# Altium PCB PPM_USB_panelized.PcbDoc
Units mm, origin at the board's own origin, x right, y up, seen from the top; angles counter-clockwise.
Board outline 70.2 x 74.91 mm, 2 copper layers (Top Layer, Bottom Layer); 108 components, 0 nets, 408 pads, 36 vias.
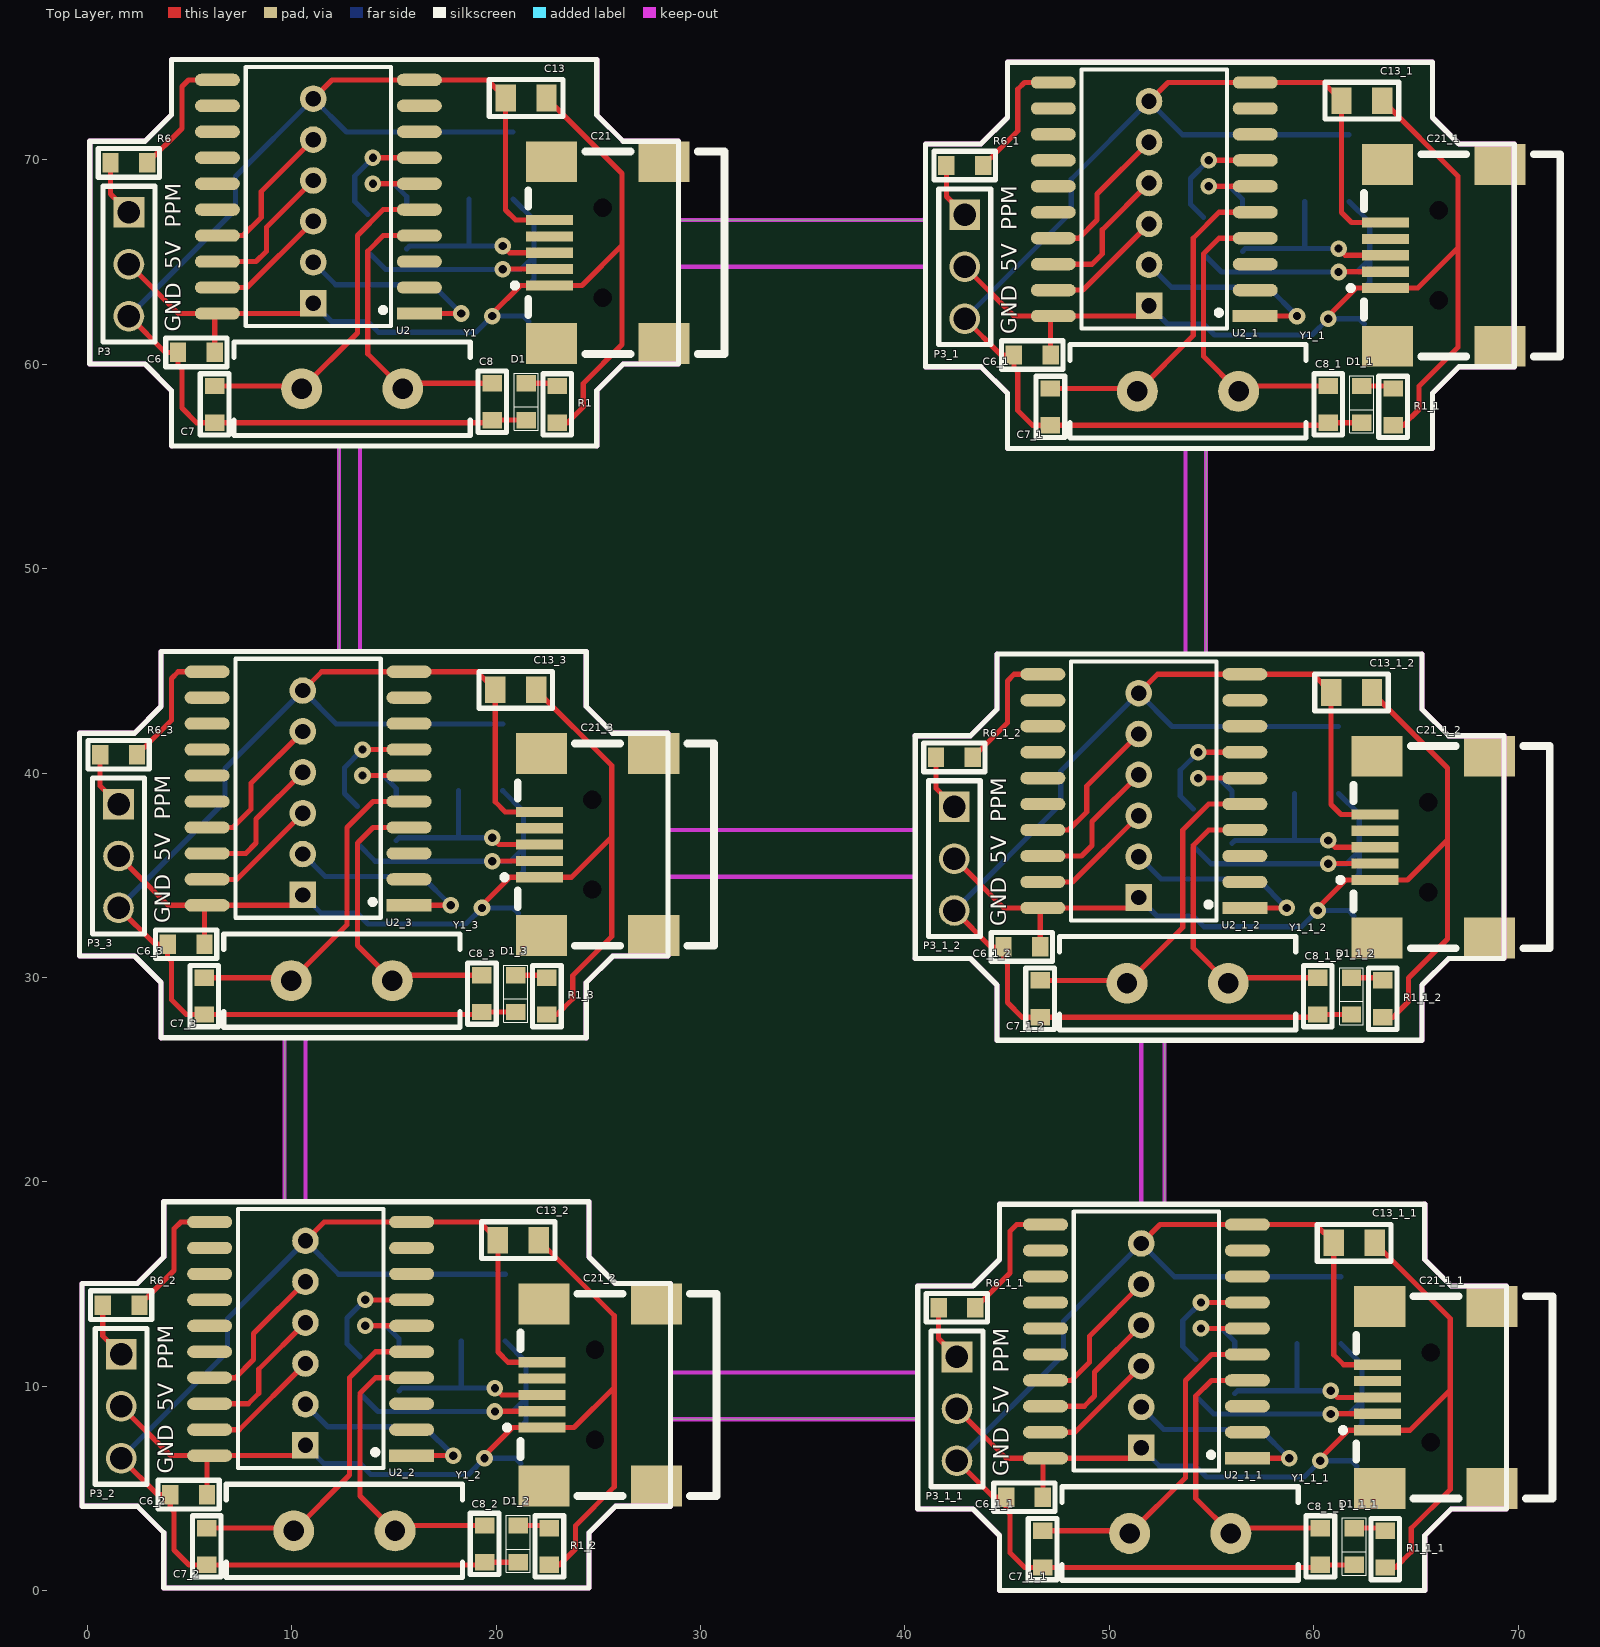
[diagram p0: Top Layer view]
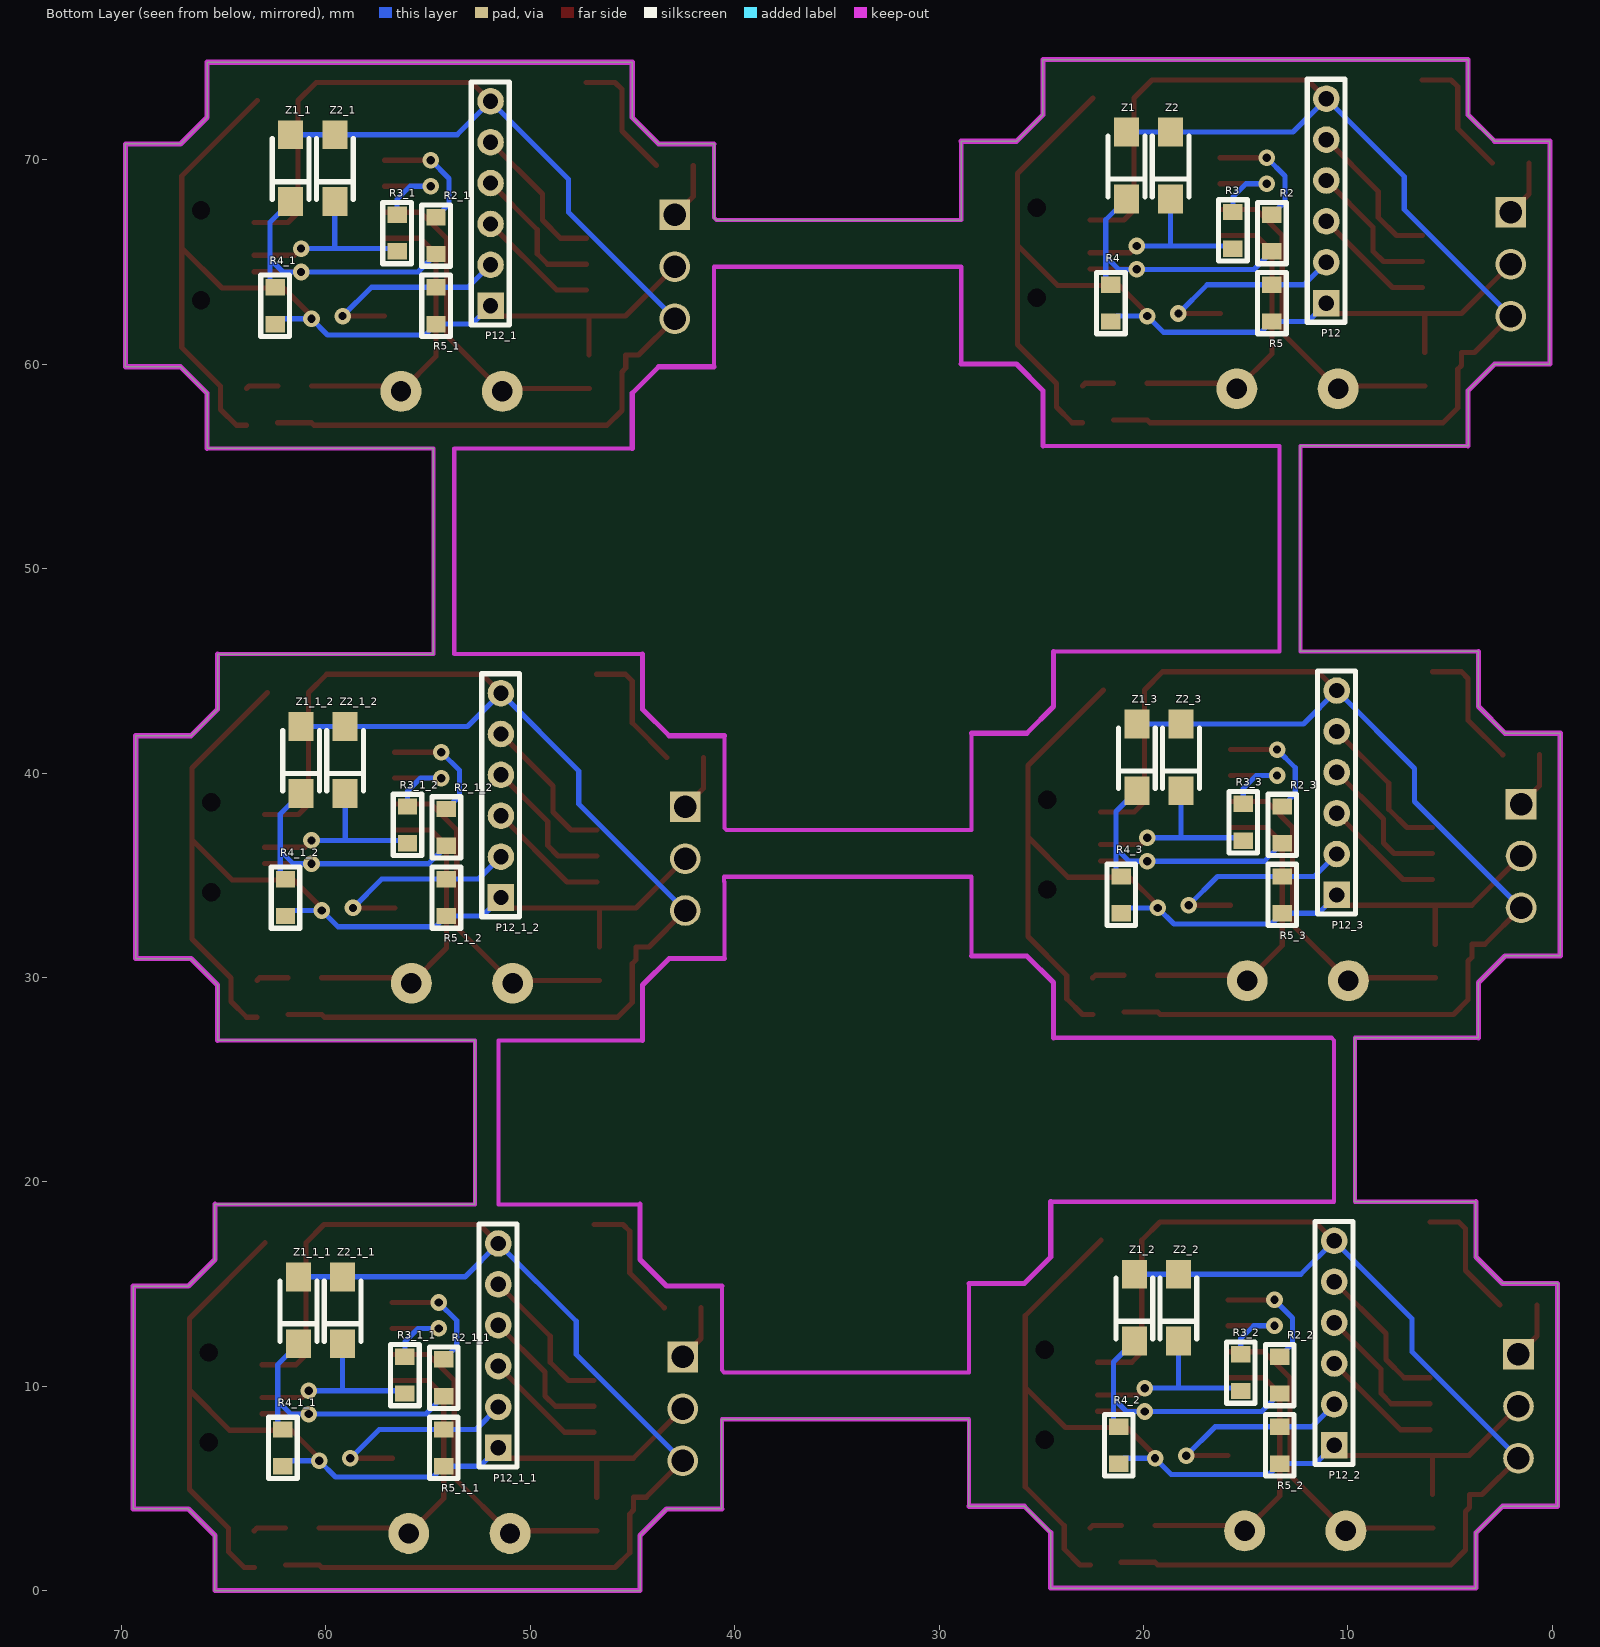
[diagram p1: Bottom Layer view, seen from below]

## Layer stack, top to bottom
Top Solder: solder mask 0.0102, Solder Resist, Dk 3.5
Top Layer: signal copper 0.0356
Dielectric 1: dielectric 0.32, FR-4, Dk 4.8
Bottom Layer: signal copper 0.0356
Bottom Solder: solder mask 0.0102, Solder Resist, Dk 3.5

## Board outline
-0.265,4.126 2.435,4.126 3.735,2.826 3.735,0.126 24.535,0.126 24.535,2.826 25.835,4.126 28.535,4.126 28.535,8.382 40.629,8.382 40.629,3.999 43.329,3.999 44.629,2.699 44.629,-0.001 65.429,-0.001 65.429,2.699 66.729,3.999 69.429,3.999 69.429,14.899 66.729,14.899 65.429,16.199 65.429,18.899 52.705,18.899 52.705,26.923 65.302,26.923 65.302,29.623 66.602,30.923 69.302,30.923 69.302,41.823 66.602,41.823 65.302,43.123 65.302,45.823 54.737,45.823 54.737,55.88 54.736,55.879 65.81,55.879 65.81,58.579 67.11,59.879 69.81,59.879 69.81,70.779 67.11,70.779 65.81,72.079 65.81,74.779 45.01,74.779 45.01,72.079 43.71,70.779 41.01,70.779 41.01,67.172 40.894,67.056 28.916,67.056 28.916,70.906 26.216,70.906 24.916,72.206 24.916,74.906 4.116,74.906 4.116,72.206 2.816,70.906 0.116,70.906 0.116,60.006 2.816,60.006 4.116,58.706 4.116,56.006 12.319,56.006 12.319,45.95 3.608,45.95 3.608,43.25 2.308,41.95 -0.392,41.95 -0.392,31.05 2.308,31.05 3.608,29.75 3.608,27.05 9.652,27.05 9.652,19.026 3.735,19.026 3.735,16.326 2.435,15.026 -0.265,15.026

## Design rules (kind name [scope] priority, off if disabled: settings)
Clearance [All] p1: gap=0.254
PolygonConnect [All] p1: connectstyle=Relief reliefconductorwidth=0.254 reliefentries=4 polygonreliefangle="90 Angle" airgapwidth=0.254
RoutingVias [All] p1: holewidth=0.711 width=1.27 viastyle="Through Hole" minholewidth=0.711 minwidth=1.27 maxholewidth=0.711 maxwidth=1.27
SolderMaskExpansion [All] p1: expansion=0.102
Width [All] p1: maxlimit=0.254 minlimit=0.254 preferedwidth=0.254
30 further rules are at their usual default settings.

## Components (designator, comment, footprint, x,y, rotation, side; value= is the part's Value field where it differs from the comment)
C6 "100nF" FP_0603_CAP_080 5.334,60.579 r0 top
C6_1 "100nF" FP_0603_CAP_080 46.228,60.452 r0 top
C6_1_1 "100nF" FP_0603_CAP_080 45.847,4.572 r0 top
C6_1_2 "100nF" FP_0603_CAP_080 45.72,31.496 r0 top
C6_2 "100nF" FP_0603_CAP_080 4.953,4.699 r0 top
C6_3 "100nF" FP_0603_CAP_080 4.826,31.623 r0 top
C7 "27pF" FP_0603_CAP_080 6.223,58.039 r90 top
C7_1 "27pF" FP_0603_CAP_080 47.117,57.912 r90 top (schematic designator C7)
C7_1_1 "27pF" FP_0603_CAP_080 46.736,2.032 r90 top (schematic designator C7)
C7_1_2 "27pF" FP_0603_CAP_080 46.609,28.956 r90 top (schematic designator C7)
C7_2 "27pF" FP_0603_CAP_080 5.842,2.159 r90 top (schematic designator C7)
C7_3 "27pF" FP_0603_CAP_080 5.715,29.083 r90 top (schematic designator C7)
C8 "27pF" FP_0603_CAP_080 19.812,58.166 r90 top
C8_1 "27pF" FP_0603_CAP_080 60.706,58.039 r90 top (schematic designator C8)
C8_1_1 "27pF" FP_0603_CAP_080 60.325,2.159 r90 top (schematic designator C8)
C8_1_2 "27pF" FP_0603_CAP_080 60.198,29.083 r90 top (schematic designator C8)
C8_2 "27pF" FP_0603_CAP_080 19.431,2.286 r90 top (schematic designator C8)
C8_3 "27pF" FP_0603_CAP_080 19.304,29.21 r90 top (schematic designator C8)
C13 "22uF" FP_0805_CAP_085 21.463,73.025 r0 top
C13_1 "22uF" FP_0805_CAP_085 62.357,72.898 r0 top (schematic designator C13)
C13_1_1 "22uF" FP_0805_CAP_085 61.976,17.018 r0 top (schematic designator C13)
C13_1_2 "22uF" FP_0805_CAP_085 61.849,43.942 r0 top (schematic designator C13)
C13_2 "22uF" FP_0805_CAP_085 21.082,17.145 r0 top (schematic designator C13)
C13_3 "22uF" FP_0805_CAP_085 20.955,44.069 r0 top (schematic designator C13)
C21 "mini USB" USB/SM0.8-6H5 25.416,65.456 r0 top
C21_1 "mini USB" USB/SM0.8-6H5 66.31,65.329 r0 top (schematic designator C21)
C21_1_1 "mini USB" USB/SM0.8-6H5 65.929,9.449 r0 top (schematic designator C21)
C21_1_2 "mini USB" USB/SM0.8-6H5 65.802,36.373 r0 top (schematic designator C21)
C21_2 "mini USB" USB/SM0.8-6H5 25.035,9.576 r0 top (schematic designator C21)
C21_3 "mini USB" USB/SM0.8-6H5 24.908,36.5 r0 top (schematic designator C21)
D1 "GREEN" FP_0603_LED_G 21.463,58.166 r270 top
D1_1 "GREEN" FP_0603_LED_G 62.357,58.039 r270 top (schematic designator D1)
D1_1_1 "GREEN" FP_0603_LED_G 61.976,2.159 r270 top (schematic designator D1)
D1_1_2 "GREEN" FP_0603_LED_G 61.849,29.083 r270 top (schematic designator D1)
D1_2 "GREEN" FP_0603_LED_G 21.082,2.286 r270 top (schematic designator D1)
D1_3 "GREEN" FP_0603_LED_G 20.955,29.21 r270 top (schematic designator D1)
P3 "Header 1X3" HEADER_2.54MM_M_1x3 2.032,64.897 r270 top
P3_1 "Header 1X3" HEADER_2.54MM_M_1x3 42.926,64.77 r270 top
P3_1_1 "Header 1X3" HEADER_2.54MM_M_1x3 42.545,8.89 r270 top
P3_1_2 "Header 1X3" HEADER_2.54MM_M_1x3 42.418,35.814 r270 top
P3_2 "Header 1X3" HEADER_2.54MM_M_1x3 1.651,9.017 r270 top
P3_3 "Header 1X3" HEADER_2.54MM_M_1x3 1.524,35.941 r270 top
P12 "ISP" HEADER_2.00MM_M_1x6 11.049,62.992 r90 bottom
P12_1 "ISP" HEADER_2.00MM_M_1x6 51.943,62.865 r90 bottom (schematic designator P12)
P12_1_1 "ISP" HEADER_2.00MM_M_1x6 51.562,6.985 r90 bottom (schematic designator P12)
P12_1_2 "ISP" HEADER_2.00MM_M_1x6 51.435,33.909 r90 bottom (schematic designator P12)
P12_2 "ISP" HEADER_2.00MM_M_1x6 10.668,7.112 r90 bottom (schematic designator P12)
P12_3 "ISP" HEADER_2.00MM_M_1x6 10.541,34.036 r90 bottom (schematic designator P12)
R1 "390R" FP_0603_RES 22.987,58.039 r90 top
R1_1 "390R" FP_0603_RES 63.881,57.912 r90 top (schematic designator R1)
R1_1_1 "390R" FP_0603_RES 63.5,2.032 r90 top (schematic designator R1)
R1_1_2 "390R" FP_0603_RES 63.373,28.956 r90 top (schematic designator R1)
R1_2 "390R" FP_0603_RES 22.606,2.159 r90 top (schematic designator R1)
R1_3 "390R" FP_0603_RES 22.479,29.083 r90 top (schematic designator R1)
R2 "68R" FP_0603_RES 13.716,66.421 r270 bottom
R2_1 "68R" FP_0603_RES 54.61,66.294 r270 bottom (schematic designator R2)
R2_1_1 "68R" FP_0603_RES 54.229,10.414 r270 bottom (schematic designator R2)
R2_1_2 "68R" FP_0603_RES 54.102,37.338 r270 bottom (schematic designator R2)
R2_2 "68R" FP_0603_RES 13.335,10.541 r270 bottom (schematic designator R2)
R2_3 "68R" FP_0603_RES 13.208,37.465 r270 bottom (schematic designator R2)
R3 "68R" FP_0603_RES 15.621,66.548 r270 bottom
R3_1 "68R" FP_0603_RES 56.515,66.421 r270 bottom
R3_1_1 "68R" FP_0603_RES 56.134,10.541 r270 bottom
R3_1_2 "68R" FP_0603_RES 56.007,37.465 r270 bottom
R3_2 "68R" FP_0603_RES 15.24,10.668 r270 bottom
R3_3 "68R" FP_0603_RES 15.113,37.592 r270 bottom
R4 "1K5" FP_0603_RES 21.59,62.992 r90 bottom
R4_1 "1K5" FP_0603_RES 62.484,62.865 r90 bottom (schematic designator R4)
R4_1_1 "1K5" FP_0603_RES 62.103,6.985 r90 bottom (schematic designator R4)
R4_1_2 "1K5" FP_0603_RES 61.976,33.909 r90 bottom (schematic designator R4)
R4_2 "1K5" FP_0603_RES 21.209,7.112 r90 bottom (schematic designator R4)
R4_3 "1K5" FP_0603_RES 21.082,34.036 r90 bottom (schematic designator R4)
R5 "10K" FP_0603_RES 13.716,62.992 r90 bottom
R5_1 "10K" FP_0603_RES 54.61,62.865 r90 bottom (schematic designator R5)
R5_1_1 "10K" FP_0603_RES 54.229,6.985 r90 bottom (schematic designator R5)
R5_1_2 "10K" FP_0603_RES 54.102,33.909 r90 bottom (schematic designator R5)
R5_2 "10K" FP_0603_RES 13.335,7.112 r90 bottom (schematic designator R5)
R5_3 "10K" FP_0603_RES 13.208,34.036 r90 bottom (schematic designator R5)
R6 "10K" FP_0603_RES 2.032,69.85 r180 top
R6_1 "10K" FP_0603_RES 42.926,69.723 r180 top (schematic designator R6)
R6_1_1 "10K" FP_0603_RES 42.545,13.843 r180 top (schematic designator R6)
R6_1_2 "10K" FP_0603_RES 42.418,40.767 r180 top (schematic designator R6)
R6_2 "10K" FP_0603_RES 1.651,13.97 r180 top (schematic designator R6)
R6_3 "10K" FP_0603_RES 1.524,40.894 r180 top (schematic designator R6)
U2 "ATTiny2313" DIGITAL_SOIC20W 11.303,68.199 r270 top
U2_1 "ATTiny2313" DIGITAL_SOIC20W 52.197,68.072 r270 top (schematic designator U2)
U2_1_1 "ATTiny2313" DIGITAL_SOIC20W 51.816,12.192 r270 top (schematic designator U2)
U2_1_2 "ATTiny2313" DIGITAL_SOIC20W 51.689,39.116 r270 top (schematic designator U2)
U2_2 "ATTiny2313" DIGITAL_SOIC20W 10.922,12.319 r270 top (schematic designator U2)
U2_3 "ATTiny2313" DIGITAL_SOIC20W 10.795,39.243 r270 top (schematic designator U2)
Y1 "12Mhz" FP_CRYSTAL_HC49_TH 12.954,58.801 r0 top
Y1_1 "12Mhz" FP_CRYSTAL_HC49_TH 53.848,58.674 r0 top (schematic designator Y1)
Y1_1_1 "12Mhz" FP_CRYSTAL_HC49_TH 53.467,2.794 r0 top (schematic designator Y1)
Y1_1_2 "12Mhz" FP_CRYSTAL_HC49_TH 53.34,29.718 r0 top (schematic designator Y1)
Y1_2 "12Mhz" FP_CRYSTAL_HC49_TH 12.573,2.921 r0 top (schematic designator Y1)
Y1_3 "12Mhz" FP_CRYSTAL_HC49_TH 12.446,29.845 r0 top (schematic designator Y1)
Z1 "3V6" FP_SOD-123 20.828,69.723 r270 bottom
Z1_1 "3V6" FP_SOD-123 61.722,69.596 r270 bottom (schematic designator Z1)
Z1_1_1 "3V6" FP_SOD-123 61.341,13.716 r270 bottom (schematic designator Z1)
Z1_1_2 "3V6" FP_SOD-123 61.214,40.64 r270 bottom (schematic designator Z1)
Z1_2 "3V6" FP_SOD-123 20.447,13.843 r270 bottom (schematic designator Z1)
Z1_3 "3V6" FP_SOD-123 20.32,40.767 r270 bottom (schematic designator Z1)
Z2 "3V6" FP_SOD-123 18.669,69.723 r270 bottom
Z2_1 "3V6" FP_SOD-123 59.563,69.596 r270 bottom (schematic designator Z2)
Z2_1_1 "3V6" FP_SOD-123 59.182,13.716 r270 bottom (schematic designator Z2)
Z2_1_2 "3V6" FP_SOD-123 59.055,40.64 r270 bottom (schematic designator Z2)
Z2_2 "3V6" FP_SOD-123 18.288,13.843 r270 bottom (schematic designator Z2)
Z2_3 "3V6" FP_SOD-123 18.161,40.767 r270 bottom (schematic designator Z2)

## Footprints (in the part's own frame and the unit in brackets; to place one, negate y for a bottom-side part, rotate by r counter-clockwise, add the part's x,y. Pads: shape width x height; smd on the part's side, far side on the other; paste and mask are expansions set on the pad)
DIGITAL_SOIC20W [mm]
  rect 0.6x2.2 smd: 1(5.715,4.94)
  oval 0.6x2.2 smd: 2(4.445,4.94) 3(3.175,4.94) 4(1.905,4.94) 5(0.635,4.94) 6(-0.635,4.94) 7(-1.905,4.94) 8(-3.175,4.94) 9(-4.445,4.94) 10(-5.715,4.94) 11(-5.715,-4.94) 12(-4.445,-4.94) 13(-3.175,-4.94) 14(-1.905,-4.94) 15(-0.635,-4.94) 16(0.635,-4.94) 17(1.905,-4.94) 18(3.175,-4.94) 19(4.445,-4.94) 20(5.715,-4.94)
  silkscreen extent -6.35,-3.56 6.32,3.56, body extent -6.4,-5.15 6.4,5.15, height 2.7
FP_0603_CAP_080 [mm] "0.8mm magas 0603 kapacitás"
  rect 0.8x0.95 smd: 1(-0.9,0) 2(0.9,0)
  silkscreen extent -1.5,-0.7 1.5,0.7, body extent -0.8,-0.4 0.76,0.4, height 0.8
FP_0603_LED_G [mm] "0603 LED"
  rect 0.8x0.95 smd: A(-0.9,0) K(0.9,0)
  silkscreen extent -1.4,-0.58 1.4,0.58, body extent -0.8,-0.4 0.8,0.4, height 0.6
FP_0603_RES [mm] "0603 ellenállás"
  rect 0.8x0.95 smd: 1(-0.9,0) 2(0.9,0)
  silkscreen extent -1.5,-0.7 1.5,0.7, body extent -0.8,-0.4 0.8,0.4, height 0.44
FP_0805_CAP_085 [mm] "0805 kapacitás YAGEO 0.85mm magas"
  rect 1x1.3 smd: 1(-1,0) 2(1,0)
  silkscreen extent -1.8,-0.9 1.8,0.9, body extent -1,-0.64 1.03,0.64, height 0.85
FP_CRYSTAL_HC49_TH [mm] "HC49/SMD"
  round 2 hole 1: 1(-2.476,0) 2(2.477,0)
  silkscreen extent -5.78,-2.29 5.78,2.29, body extent -5.49,-2.29 5.49,2.21, height 3.6
FP_SOD-123 [mm]
  rect 1.41x1.22 smd: A(-1.635,0) K(1.635,0)
  silkscreen extent -1.44,-0.9 1.52,0.9, body extent -1.93,-0.85 1.92,0.85, height 1.47
HEADER_2.00MM_M_1x6 [mm]
  rect 1.3x1.3 hole 0.75: 1(0,0)
  round 1.3 hole 0.75: 2(2,0) 3(4,0) 4(6,0) 5(8,0) 6(10,0)
  silkscreen extent -0.94,-0.91 10.95,0.94
HEADER_2.54MM_M_1x3 [mm] "3×1 tüskesor"
  rect 1.5x1.5 hole 1.1: 1(-2.54,0)
  round 1.5 hole 1.1: 2(0,0) 3(2.54,0)
  silkscreen extent -3.81,-1.27 3.81,1.27, body extent -3.78,-1.27 3.79,1.27, height 8.54
USB/SM0.8-6H5 [mm] "Connector; USB2.0, Type B, SM; 5 Position; Right Angle"
  rect 2.3x0.5 smd: 1(-2.8,-1.6) 2(-2.8,-0.8) 3(-2.8,0) 4(-2.8,0.8) 5(-2.8,1.6)
  rect 2.5x2 smd: 6(-2.7,4.45) 7(2.8,4.45) 8(-2.7,-4.45) 9(2.8,-4.45)
  round 0.6 hole 0.9 unplated: MH1(-0.2,2.2) MH2(-0.2,-2.2)
  silkscreen extent -4.62,-4.95 5.75,4.95, body extent -3.51,-5.35 5.69,5.35, height 3.95

## Part data
C6 C6_1 C6_1_1 C6_1_2 C6_2 C6_3 C7 C7_1 C7_1_1 C7_1_2 C7_2 C7_3 C8 C8_1 C8_1_1 C8_1_2 C8_2 C8_3 C13 C13_1 C13_1_1 C13_1_2 C13_2 C13_3: library part CAP, "Capacitor"
D1 D1_1 D1_1_1 D1_1_2 D1_2 D1_3: library part LED_G, "Typical LED"
P3 P3_1 P3_1_1 P3_1_2 P3_2 P3_3: "Header, 3-Pin"
P12 P12_1 P12_1_1 P12_1_2 P12_2 P12_3: library part "Header 6", "Header, 6-Pin"
R1 R1_1 R1_1_1 R1_1_2 R1_2 R1_3 R2 R2_1 R2_1_1 R2_1_2 R2_2 R2_3 R3 R3_1 R3_1_1 R3_1_2 R3_2 R3_3 R4 R4_1 R4_1_1 R4_1_2 R4_2 R4_3 R5 R5_1 R5_1_1 R5_1_2 R5_2 R5_3 R6 R6_1 R6_1_1 R6_1_2 R6_2 R6_3: library part RES, "Resistor"
Y1 Y1_1 Y1_1_1 Y1_1_2 Y1_2 Y1_3: library part XTAL, "Quartz"
Z1 Z1_1 Z1_1_1 Z1_1_2 Z1_2 Z1_3 Z2 Z2_1 Z2_1_1 Z2_1_2 Z2_2 Z2_3: library part ZENER, "Zener Diode"

## Via types
v1: diameter 0.813, hole 0.406, Top Layer to Bottom Layer, tented both sides, 36 vias

## Nets (pads, with @x,y where several pads share a name; then routed paths per layer and width w, separated by ;. In a path a pad name is that pad's centre, name@x,y a point inside that pad or via, vN(x,y) a via of type N, cw(c..) or ccw(c..) an arc to the next point about the centre after c; other vN are vias at no path point)
pads on no net: C6.1 C6.2 C6_1.1 C6_1.2 C6_1_1.1 C6_1_1.2 C6_1_2.1 C6_1_2.2 C6_2.1 C6_2.2 C6_3.1 C6_3.2 C7.1 C7.2 C7_1.1 C7_1.2 C7_1_1.1 C7_1_1.2 C7_1_2.1 C7_1_2.2 C7_2.1 C7_2.2 C7_3.1 C7_3.2 C8.1 C8.2 C8_1.1 C8_1.2 C8_1_1.1 C8_1_1.2 C8_1_2.1 C8_1_2.2 C8_2.1 C8_2.2 C8_3.1 C8_3.2 C13.1 C13.2 C13_1.1 C13_1.2 C13_1_1.1 C13_1_1.2 C13_1_2.1 C13_1_2.2 C13_2.1 C13_2.2 C13_3.1 C13_3.2 C21.1 C21.2 C21.3 C21.4 C21.5 C21.6 C21.7 C21.8 C21.9 C21.MH1 C21.MH2 C21_1.1 C21_1.2 C21_1.3 C21_1.4 C21_1.5 C21_1.6 C21_1.7 C21_1.8 C21_1.9 C21_1.MH1 C21_1.MH2 C21_1_1.1 C21_1_1.2 C21_1_1.3 C21_1_1.4 C21_1_1.5 C21_1_1.6 C21_1_1.7 C21_1_1.8 C21_1_1.9 C21_1_1.MH1 C21_1_1.MH2 C21_1_2.1 C21_1_2.2 C21_1_2.3 C21_1_2.4 C21_1_2.5 C21_1_2.6 C21_1_2.7 C21_1_2.8 C21_1_2.9 C21_1_2.MH1 C21_1_2.MH2 C21_2.1 C21_2.2 C21_2.3 C21_2.4 C21_2.5 C21_2.6 C21_2.7 C21_2.8 C21_2.9 C21_2.MH1 C21_2.MH2 C21_3.1 C21_3.2 C21_3.3 C21_3.4 C21_3.5 C21_3.6 C21_3.7 C21_3.8 C21_3.9 C21_3.MH1 C21_3.MH2 D1.A D1.K D1_1.A D1_1.K D1_1_1.A D1_1_1.K D1_1_2.A D1_1_2.K D1_2.A D1_2.K D1_3.A D1_3.K P3.1 P3.2 P3.3 P3_1.1 P3_1.2 P3_1.3 P3_1_1.1 P3_1_1.2 P3_1_1.3 P3_1_2.1 P3_1_2.2 P3_1_2.3 P3_2.1 P3_2.2 P3_2.3 P3_3.1 P3_3.2 P3_3.3 P12.1 P12.2 P12.3 P12.4 P12.5 P12.6 P12_1.1 P12_1.2 P12_1.3 P12_1.4 P12_1.5 P12_1.6 P12_1_1.1 P12_1_1.2 P12_1_1.3 P12_1_1.4 P12_1_1.5 P12_1_1.6 P12_1_2.1 P12_1_2.2 P12_1_2.3 P12_1_2.4 P12_1_2.5 P12_1_2.6 P12_2.1 P12_2.2 P12_2.3 P12_2.4 P12_2.5 P12_2.6 P12_3.1 P12_3.2 P12_3.3 P12_3.4 P12_3.5 P12_3.6 R1.1 R1.2 R1_1.1 R1_1.2 R1_1_1.1 R1_1_1.2 R1_1_2.1 R1_1_2.2 R1_2.1 R1_2.2 R1_3.1 R1_3.2 R2.1 R2.2 R2_1.1 R2_1.2 R2_1_1.1 R2_1_1.2 R2_1_2.1 R2_1_2.2 R2_2.1 R2_2.2 R2_3.1 R2_3.2 R3.1 R3.2 R3_1.1 R3_1.2 R3_1_1.1 R3_1_1.2 R3_1_2.1 R3_1_2.2 R3_2.1 R3_2.2 R3_3.1 R3_3.2 R4.1 R4.2 R4_1.1 R4_1.2 R4_1_1.1 R4_1_1.2 R4_1_2.1 R4_1_2.2 R4_2.1 R4_2.2 R4_3.1 R4_3.2 R5.1 R5.2 R5_1.1 R5_1.2 R5_1_1.1 R5_1_1.2 R5_1_2.1 R5_1_2.2 R5_2.1 R5_2.2 R5_3.1 R5_3.2 R6.1 R6.2 R6_1.1 R6_1.2 R6_1_1.1 R6_1_1.2 R6_1_2.1 R6_1_2.2 R6_2.1 R6_2.2 R6_3.1 R6_3.2 U2.1 U2.2 U2.3 U2.4 U2.5 U2.6 U2.7 U2.8 U2.9 U2.10 U2.11 U2.12 U2.13 U2.14 U2.15 U2.16 U2.17 U2.18 U2.19 U2.20 U2_1.1 U2_1.2 U2_1.3 U2_1.4 U2_1.5 U2_1.6 U2_1.7 U2_1.8 U2_1.9 U2_1.10 U2_1.11 U2_1.12 U2_1.13 U2_1.14 U2_1.15 U2_1.16 U2_1.17 U2_1.18 U2_1.19 U2_1.20 U2_1_1.1 U2_1_1.2 U2_1_1.3 U2_1_1.4 U2_1_1.5 U2_1_1.6 U2_1_1.7 U2_1_1.8 U2_1_1.9 U2_1_1.10 U2_1_1.11 U2_1_1.12 U2_1_1.13 U2_1_1.14 U2_1_1.15 U2_1_1.16 U2_1_1.17 U2_1_1.18 U2_1_1.19 U2_1_1.20 U2_1_2.1 U2_1_2.2 U2_1_2.3 U2_1_2.4 U2_1_2.5 U2_1_2.6 U2_1_2.7 U2_1_2.8 U2_1_2.9 U2_1_2.10 U2_1_2.11 U2_1_2.12 U2_1_2.13 U2_1_2.14 U2_1_2.15 U2_1_2.16 U2_1_2.17 U2_1_2.18 U2_1_2.19 U2_1_2.20 U2_2.1 U2_2.2 U2_2.3 U2_2.4 U2_2.5 U2_2.6 U2_2.7 U2_2.8 U2_2.9 U2_2.10 U2_2.11 U2_2.12 U2_2.13 U2_2.14 U2_2.15 U2_2.16 U2_2.17 U2_2.18 U2_2.19 U2_2.20 U2_3.1 U2_3.2 U2_3.3 U2_3.4 U2_3.5 U2_3.6 U2_3.7 U2_3.8 U2_3.9 U2_3.10 U2_3.11 U2_3.12 U2_3.13 U2_3.14 U2_3.15 U2_3.16 U2_3.17 U2_3.18 U2_3.19 U2_3.20 Y1.1 Y1.2 Y1_1.1 Y1_1.2 Y1_1_1.1 Y1_1_1.2 Y1_1_2.1 Y1_1_2.2 Y1_2.1 Y1_2.2 Y1_3.1 Y1_3.2 Z1.A Z1.K Z1_1.A Z1_1.K Z1_1_1.A Z1_1_1.K Z1_1_2.A Z1_1_2.K Z1_2.A Z1_2.K Z1_3.A Z1_3.K Z2.A Z2.K Z2_1.A Z2_1.K Z2_1_1.A Z2_1_1.K Z2_1_2.A Z2_1_2.K Z2_2.A Z2_2.K Z2_3.A Z2_3.K
copper on no net: | length 1349.9
  Top Layer w0.254: 0.624,40.894 0.624,39.381 1.524,38.481 ; 0.751,13.97 0.751,12.457 1.651,11.557 ; 1.132,69.85 1.132,68.337 2.032,67.437 ; 1.524,33.401 3.302,31.623 3.926,31.623 3.926,30.988 4.116,30.798 4.116,28.904 4.837,28.183 5.715,28.183 19.177,28.183 19.304,28.31 20.955,28.31 ; 1.524,35.941 3.937,33.528 5.855,33.528 10.033,33.528 10.541,34.036 ; 1.651,6.477 3.429,4.699 4.053,4.699 4.053,4.064 4.243,3.874 4.243,1.98 4.964,1.259 5.842,1.259 19.304,1.259 19.431,1.386 21.082,1.386 ; 1.651,9.017 4.064,6.604 5.982,6.604 10.16,6.604 10.668,7.112 ; 2.032,62.357 3.81,60.579 4.434,60.579 4.434,59.944 4.624,59.754 4.624,57.86 5.345,57.139 6.223,57.139 19.685,57.139 19.812,57.266 21.463,57.266 ; 2.032,64.897 4.445,62.484 6.363,62.484 10.541,62.484 11.049,62.992 ; 2.424,40.894 4.116,42.586 4.116,44.629 4.445,44.958 5.855,44.958 ; 2.551,13.97 4.243,15.662 4.243,17.705 4.572,18.034 5.982,18.034 ; 2.932,69.85 4.624,71.542 4.624,73.585 4.953,73.914 6.363,73.914 ; 5.715,29.983 9.831,29.983 9.97,29.845 12.7,32.575 12.7,37.338 13.97,38.608 15.735,38.608 ; 5.726,31.623 5.726,33.399 ; 5.842,3.059 9.958,3.059 10.096,2.921 12.827,5.651 12.827,10.414 14.097,11.684 15.862,11.684 ; 5.853,4.699 5.853,6.475 ; 5.855,34.798 7.303,34.798 10.541,38.036 ; 5.855,36.068 7.747,36.068 8.255,36.576 8.255,37.75 10.541,40.036 ; 5.855,37.338 7.112,37.338 8.001,38.227 8.001,39.496 10.541,42.036 ; 5.982,7.874 7.43,7.874 10.668,11.112 ; 5.982,9.144 7.874,9.144 8.382,9.652 8.382,10.826 10.668,13.112 ; 5.982,10.414 7.239,10.414 8.128,11.303 8.128,12.572 10.668,15.112 ; 6.223,58.939 10.339,58.939 10.477,58.801 13.208,61.531 13.208,66.294 14.478,67.564 16.243,67.564 ; 6.234,60.579 6.234,62.355 ; 6.363,63.754 7.811,63.754 11.049,66.992 ; 6.363,65.024 8.255,65.024 8.763,65.532 8.763,66.706 11.049,68.992 ; 6.363,66.294 7.62,66.294 8.509,67.183 8.509,68.452 11.049,70.992 ; 10.541,44.036 11.463,44.958 15.735,44.958 19.066,44.958 19.955,44.069 19.955,38.592 20.447,38.1 22.108,38.1 ; 10.668,17.112 11.59,18.034 15.862,18.034 19.193,18.034 20.082,17.145 20.082,11.668 20.574,11.176 22.235,11.176 ; 11.049,72.992 11.971,73.914 16.243,73.914 19.574,73.914 20.463,73.025 20.463,67.548 20.955,67.056 22.616,67.056 ; v1(13.462,39.878) 15.735,39.878 ; v1(13.462,41.148) 15.735,41.148 ; v1(13.589,12.954) 15.862,12.954 ; v1(13.589,14.224) 15.862,14.224 ; v1(13.97,68.834) 16.243,68.834 ; v1(13.97,70.104) 16.243,70.104 ; 15.735,33.528 v1(17.78,33.528) ; 15.735,37.338 13.97,37.338 13.208,36.576 13.208,31.56 14.923,29.845 15.188,30.11 19.304,30.11 ; 15.862,6.604 v1(17.907,6.604) ; 15.862,10.414 14.097,10.414 13.335,9.652 13.335,4.636 15.05,2.921 15.315,3.186 19.431,3.186 ; 16.243,62.484 v1(18.288,62.484) ; 16.243,66.294 14.478,66.294 13.716,65.532 13.716,60.516 15.431,58.801 15.696,59.066 19.812,59.066 ; v1(19.304,33.401) 19.304,33.528 20.676,34.9 22.108,34.9 23.687,34.9 25.654,36.867 ; v1(19.431,6.477) 19.431,6.604 20.803,7.976 22.235,7.976 23.814,7.976 25.781,9.943 ; v1(19.812,35.687) 19.825,35.7 22.108,35.7 ; v1(19.812,36.83) 20.142,36.5 22.108,36.5 ; v1(19.812,62.357) 19.812,62.484 21.184,63.856 22.616,63.856 24.195,63.856 26.162,65.823 ; v1(19.939,8.763) 19.952,8.776 22.235,8.776 ; v1(19.939,9.906) 20.269,9.576 22.235,9.576 ; v1(20.32,64.643) 20.333,64.656 22.616,64.656 ; v1(20.32,65.786) 20.65,65.456 22.616,65.456 ; 20.955,30.11 22.352,30.11 22.479,29.983 ; 21.082,3.186 22.479,3.186 22.606,3.059 ; 21.463,59.066 22.86,59.066 22.987,58.939 ; 21.955,44.069 25.654,40.37 25.654,36.867 ; 22.082,17.145 25.781,13.446 25.781,9.943 ; 22.463,73.025 26.162,69.326 26.162,65.823 ; 22.479,28.183 22.976,28.183 23.749,28.956 23.749,30.099 25.654,32.004 25.654,36.867 ; 22.606,1.259 23.103,1.259 23.876,2.032 23.876,3.175 25.781,5.08 25.781,9.943 ; 22.987,57.139 23.484,57.139 24.257,57.912 24.257,59.055 26.162,60.96 26.162,65.823 ; 41.518,40.767 41.518,39.254 42.418,38.354 ; 41.645,13.843 41.645,12.33 42.545,11.43 ; 42.026,69.723 42.026,68.21 42.926,67.31 ; 42.418,33.274 44.196,31.496 44.82,31.496 44.82,30.861 45.01,30.671 45.01,28.777 45.731,28.056 46.609,28.056 60.071,28.056 60.198,28.183 61.849,28.183 ; 42.418,35.814 44.831,33.401 46.749,33.401 50.927,33.401 51.435,33.909 ; 42.545,6.35 44.323,4.572 44.947,4.572 44.947,3.937 45.137,3.747 45.137,1.853 45.858,1.132 46.736,1.132 60.198,1.132 60.325,1.259 61.976,1.259 ; 42.545,8.89 44.958,6.477 46.876,6.477 51.054,6.477 51.562,6.985 ; 42.926,62.23 44.704,60.452 45.328,60.452 45.328,59.817 45.518,59.627 45.518,57.733 46.239,57.012 47.117,57.012 60.579,57.012 60.706,57.139 62.357,57.139 ; 42.926,64.77 45.339,62.357 47.257,62.357 51.435,62.357 51.943,62.865 ; 43.318,40.767 45.01,42.459 45.01,44.502 45.339,44.831 46.749,44.831 ; 43.445,13.843 45.137,15.535 45.137,17.578 45.466,17.907 46.876,17.907 ; 43.826,69.723 45.518,71.415 45.518,73.458 45.847,73.787 47.257,73.787 ; 46.609,29.856 50.725,29.856 50.863,29.718 53.594,32.448 53.594,37.211 54.864,38.481 56.629,38.481 ; 46.62,31.496 46.62,33.272 ; 46.736,2.932 50.852,2.932 50.99,2.794 53.721,5.524 53.721,10.287 54.991,11.557 56.756,11.557 ; 46.747,4.572 46.747,6.348 ; 46.749,34.671 48.197,34.671 51.435,37.909 ; 46.749,35.941 48.641,35.941 49.149,36.449 49.149,37.623 51.435,39.909 ; 46.749,37.211 48.006,37.211 48.895,38.1 48.895,39.369 51.435,41.909 ; 46.876,7.747 48.324,7.747 51.562,10.985 ; 46.876,9.017 48.768,9.017 49.276,9.525 49.276,10.699 51.562,12.985 ; 46.876,10.287 48.133,10.287 49.022,11.176 49.022,12.445 51.562,14.985 ; 47.117,58.812 51.233,58.812 51.371,58.674 54.102,61.404 54.102,66.167 55.372,67.437 57.137,67.437 ; 47.128,60.452 47.128,62.228 ; 47.257,63.627 48.705,63.627 51.943,66.865 ; 47.257,64.897 49.149,64.897 49.657,65.405 49.657,66.579 51.943,68.865 ; 47.257,66.167 48.514,66.167 49.403,67.056 49.403,68.325 51.943,70.865 ; 51.435,43.909 52.357,44.831 56.629,44.831 59.96,44.831 60.849,43.942 60.849,38.465 61.341,37.973 63.002,37.973 ; 51.562,16.985 52.484,17.907 56.756,17.907 60.087,17.907 60.976,17.018 60.976,11.541 61.468,11.049 63.129,11.049 ; 51.943,72.865 52.865,73.787 57.137,73.787 60.468,73.787 61.357,72.898 61.357,67.421 61.849,66.929 63.51,66.929 ; v1(54.356,39.751) 56.629,39.751 ; v1(54.356,41.021) 56.629,41.021 ; v1(54.483,12.827) 56.756,12.827 ; v1(54.483,14.097) 56.756,14.097 ; v1(54.864,68.707) 57.137,68.707 ; v1(54.864,69.977) 57.137,69.977 ; 56.629,33.401 v1(58.674,33.401) ; 56.629,37.211 54.864,37.211 54.102,36.449 54.102,31.433 55.817,29.718 56.082,29.983 60.198,29.983 ; 56.756,6.477 v1(58.801,6.477) ; 56.756,10.287 54.991,10.287 54.229,9.525 54.229,4.509 55.944,2.794 56.209,3.059 60.325,3.059 ; 57.137,62.357 v1(59.182,62.357) ; 57.137,66.167 55.372,66.167 54.61,65.405 54.61,60.389 56.325,58.674 56.59,58.939 60.706,58.939 ; v1(60.198,33.274) 60.198,33.401 61.57,34.773 63.002,34.773 64.581,34.773 66.548,36.74 ; v1(60.325,6.35) 60.325,6.477 61.697,7.849 63.129,7.849 64.708,7.849 66.675,9.816 ; v1(60.706,35.56) 60.719,35.573 63.002,35.573 ; v1(60.706,36.703) 61.036,36.373 63.002,36.373 ; v1(60.706,62.23) 60.706,62.357 62.078,63.729 63.51,63.729 65.089,63.729 67.056,65.696 ; v1(60.833,8.636) 60.846,8.649 63.129,8.649 ; v1(60.833,9.779) 61.163,9.449 63.129,9.449 ; v1(61.214,64.516) 61.227,64.529 63.51,64.529 ; v1(61.214,65.659) 61.544,65.329 63.51,65.329 ; 61.849,29.983 63.246,29.983 63.373,29.856 ; 61.976,3.059 63.373,3.059 63.5,2.932 ; 62.357,58.939 63.754,58.939 63.881,58.812 ; 62.849,43.942 66.548,40.243 66.548,36.74 ; 62.976,17.018 66.675,13.319 66.675,9.816 ; 63.357,72.898 67.056,69.199 67.056,65.696 ; 63.373,28.056 63.87,28.056 64.643,28.829 64.643,29.972 66.548,31.877 66.548,36.74 ; 63.5,1.132 63.997,1.132 64.77,1.905 64.77,3.048 66.675,4.953 66.675,9.816 ; 63.881,57.012 64.378,57.012 65.151,57.785 65.151,58.928 67.056,60.833 67.056,65.696
  Bottom Layer w0.254: 1.524,33.401 6.731,38.608 6.731,40.226 10.541,44.036 12.175,42.402 18.161,42.402 20.32,42.402 ; 1.651,6.477 6.858,11.684 6.858,13.302 10.668,17.112 12.302,15.478 18.288,15.478 20.447,15.478 ; 2.032,62.357 7.239,67.564 7.239,69.182 11.049,72.992 12.683,71.358 18.669,71.358 20.828,71.358 ; 10.541,34.036 11.441,33.136 13.208,33.136 13.735,32.609 18.512,32.609 v1(19.304,33.401) 20.817,33.401 21.082,33.136 ; 10.541,36.036 11.641,34.936 13.208,34.936 16.372,34.936 v1(17.78,33.528) ; 10.668,7.112 11.568,6.212 13.335,6.212 13.862,5.685 18.639,5.685 v1(19.431,6.477) 20.944,6.477 21.209,6.212 ; 10.668,9.112 11.768,8.012 13.335,8.012 16.499,8.012 v1(17.907,6.604) ; 11.049,62.992 11.949,62.092 13.716,62.092 14.243,61.565 19.02,61.565 v1(19.812,62.357) 21.325,62.357 21.59,62.092 ; 11.049,64.992 12.149,63.892 13.716,63.892 16.88,63.892 v1(18.288,62.484) ; 13.208,36.565 14.086,35.687 v1(19.812,35.687) 20.701,35.687 21.336,36.322 ; 13.208,38.365 12.573,39 12.573,40.259 v1(13.462,41.148) ; 13.335,9.641 14.213,8.763 v1(19.939,8.763) 20.828,8.763 21.463,9.398 ; 13.335,11.441 12.7,12.076 12.7,13.335 v1(13.589,14.224) ; v1(13.462,39.878) 14.478,39.878 15.113,39.243 15.113,38.492 ; v1(13.589,12.954) 14.605,12.954 15.24,12.319 15.24,11.568 ; 13.716,65.521 14.594,64.643 v1(20.32,64.643) 21.209,64.643 21.844,65.278 ; 13.716,67.321 13.081,67.956 13.081,69.215 v1(13.97,70.104) ; v1(13.97,68.834) 14.986,68.834 15.621,68.199 15.621,67.448 ; 15.113,36.692 15.251,36.83 18.161,36.83 ; 15.24,9.768 15.378,9.906 18.288,9.906 ; 15.621,65.648 15.759,65.786 18.669,65.786 ; 18.161,39.132 18.161,36.83 ; 18.288,12.208 18.288,9.906 ; 18.669,68.088 18.669,65.786 ; v1(19.812,36.83) 18.161,36.83 ; v1(19.939,9.906) 18.288,9.906 ; 20.32,39.132 21.336,38.116 21.336,36.322 ; v1(20.32,65.786) 18.669,65.786 ; 20.447,12.208 21.463,11.192 21.463,9.398 ; 20.828,68.088 21.844,67.072 21.844,65.278 ; 21.082,34.936 21.336,35.19 21.336,36.322 ; 21.209,8.012 21.463,8.266 21.463,9.398 ; 21.59,63.892 21.844,64.146 21.844,65.278 ; 42.418,33.274 47.625,38.481 47.625,40.099 51.435,43.909 53.069,42.275 59.055,42.275 61.214,42.275 ; 42.545,6.35 47.752,11.557 47.752,13.175 51.562,16.985 53.196,15.351 59.182,15.351 61.341,15.351 ; 42.926,62.23 48.133,67.437 48.133,69.055 51.943,72.865 53.577,71.231 59.563,71.231 61.722,71.231 ; 51.435,33.909 52.335,33.009 54.102,33.009 54.629,32.482 59.406,32.482 v1(60.198,33.274) 61.711,33.274 61.976,33.009 ; 51.435,35.909 52.535,34.809 54.102,34.809 57.266,34.809 v1(58.674,33.401) ; 51.562,6.985 52.462,6.085 54.229,6.085 54.756,5.558 59.533,5.558 v1(60.325,6.35) 61.838,6.35 62.103,6.085 ; 51.562,8.985 52.662,7.885 54.229,7.885 57.393,7.885 v1(58.801,6.477) ; 51.943,62.865 52.843,61.965 54.61,61.965 55.137,61.438 59.914,61.438 v1(60.706,62.23) 62.219,62.23 62.484,61.965 ; 51.943,64.865 53.043,63.765 54.61,63.765 57.774,63.765 v1(59.182,62.357) ; 54.102,36.438 54.98,35.56 v1(60.706,35.56) 61.595,35.56 62.23,36.195 ; 54.102,38.238 53.467,38.873 53.467,40.132 v1(54.356,41.021) ; 54.229,9.514 55.107,8.636 v1(60.833,8.636) 61.722,8.636 62.357,9.271 ; 54.229,11.314 53.594,11.949 53.594,13.208 v1(54.483,14.097) ; v1(54.356,39.751) 55.372,39.751 56.007,39.116 56.007,38.365 ; v1(54.483,12.827) 55.499,12.827 56.134,12.192 56.134,11.441 ; 54.61,65.394 55.488,64.516 v1(61.214,64.516) 62.103,64.516 62.738,65.151 ; 54.61,67.194 53.975,67.829 53.975,69.088 v1(54.864,69.977) ; v1(54.864,68.707) 55.88,68.707 56.515,68.072 56.515,67.321 ; 56.007,36.565 56.145,36.703 59.055,36.703 ; 56.134,9.641 56.272,9.779 59.182,9.779 ; 56.515,65.521 56.653,65.659 59.563,65.659 ; 59.055,39.005 59.055,36.703 ; 59.182,12.081 59.182,9.779 ; 59.563,67.961 59.563,65.659 ; v1(60.706,36.703) 59.055,36.703 ; v1(60.833,9.779) 59.182,9.779 ; 61.214,39.005 62.23,37.989 62.23,36.195 ; v1(61.214,65.659) 59.563,65.659 ; 61.341,12.081 62.357,11.065 62.357,9.271 ; 61.722,67.961 62.738,66.945 62.738,65.151 ; 61.976,34.809 62.23,35.063 62.23,36.195 ; 62.103,7.885 62.357,8.139 62.357,9.271 ; 62.484,63.765 62.738,64.019 62.738,65.151

## Keep-outs
Keep-Out Layer:
  lines w0.2: 3.608,27.05 9.652,27.05 9.652,19.026 3.735,19.026 ; 3.608,45.95 12.319,45.95 12.319,56.006 4.116,56.006 ; 13.335,56.007 13.335,45.95 24.408,45.95 ; 13.336,56.006 24.916,56.006 ; 24.408,27.05 10.795,27.05 ; 24.535,19.026 10.668,19.026 10.668,26.923 ; 28.408,31.05 28.408,34.914 ; 28.408,37.222 28.408,41.95 ; 28.419,34.925 40.513,34.925 40.513,34.693 40.502,34.682 40.502,30.923 ; 28.419,37.211 40.397,37.211 40.502,37.316 40.502,41.823 ; 28.535,4.126 28.535,8.382 40.629,8.382 40.629,3.999 ; 28.535,15.026 28.535,10.668 40.513,10.668 40.629,10.784 40.629,14.899 ; 28.916,60.006 28.916,64.77 41.01,64.77 41.01,59.879 ; 28.916,70.906 28.916,67.056 40.894,67.056 41.01,67.172 41.01,70.779 ; 44.502,26.923 51.562,26.923 51.562,18.899 44.629,18.899 ; 44.502,45.823 53.721,45.823 53.721,55.879 45.01,55.879 ; 54.736,55.879 65.81,55.879 ; 54.737,55.88 54.737,45.823 65.302,45.823 ; 65.302,26.923 52.705,26.923 52.705,18.899 65.429,18.899 ; 10.668,26.923 10.795,27.05 ; 10.668,26.923 10.795,27.05
  lines w0.254: 3.608,27.05 3.608,29.75 2.308,31.05 -0.392,31.05 -0.392,41.95 2.308,41.95 3.608,43.25 3.608,45.95 ; 3.735,19.026 3.735,16.326 2.435,15.026 -0.265,15.026 -0.265,4.126 2.435,4.126 3.735,2.826 3.735,0.126 24.535,0.126 24.535,2.826 25.835,4.126 28.535,4.126 ; 4.116,56.006 4.116,58.706 2.816,60.006 0.116,60.006 0.116,70.906 2.816,70.906 4.116,72.206 4.116,74.906 24.916,74.906 24.916,72.206 26.216,70.906 28.916,70.906 ; 24.408,27.05 24.408,29.75 25.708,31.05 28.408,31.05 ; 24.408,45.95 24.408,43.25 25.708,41.95 28.408,41.95 ; 24.535,19.026 24.535,16.326 25.835,15.026 28.535,15.026 ; 24.916,56.006 24.916,58.706 26.216,60.006 28.916,60.006 ; 40.502,30.923 43.202,30.923 44.502,29.623 44.502,26.923 ; 40.502,41.823 43.202,41.823 44.502,43.123 44.502,45.823 ; 40.629,3.999 43.329,3.999 44.629,2.699 44.629,-0.001 65.429,-0.001 65.429,2.699 66.729,3.999 69.429,3.999 69.429,14.899 66.729,14.899 65.429,16.199 65.429,18.899 ; 40.629,14.899 43.329,14.899 44.629,16.199 44.629,18.899 ; 41.01,59.879 43.71,59.879 45.01,58.579 45.01,55.879 ; 41.01,70.779 43.71,70.779 45.01,72.079 45.01,74.779 65.81,74.779 65.81,72.079 67.11,70.779 69.81,70.779 69.81,59.879 67.11,59.879 65.81,58.579 65.81,55.879 ; 65.302,26.923 65.302,29.623 66.602,30.923 69.302,30.923 69.302,41.823 66.602,41.823 65.302,43.123 65.302,45.823

## Silkscreen, mask and mechanical layers (free items; w line width, h text height)
Top Overlay:
  lines w0.254: -0.392,31.05 2.308,31.05 3.608,29.75 3.608,27.05 24.408,27.05 24.408,29.75 25.708,31.05 28.408,31.05 28.408,41.95 25.708,41.95 24.408,43.25 24.408,45.95 3.608,45.95 3.608,43.25 2.308,41.95 -0.392,41.95 -0.392,31.05 ; -0.265,4.126 2.435,4.126 3.735,2.826 3.735,0.126 24.535,0.126 24.535,2.826 25.835,4.126 28.535,4.126 28.535,15.026 25.835,15.026 24.535,16.326 24.535,19.026 3.735,19.026 3.735,16.326 2.435,15.026 -0.265,15.026 -0.265,4.126 ; 0.116,60.006 2.816,60.006 4.116,58.706 4.116,56.006 24.916,56.006 24.916,58.706 26.216,60.006 28.916,60.006 28.916,70.906 26.216,70.906 24.916,72.206 24.916,74.906 4.116,74.906 4.116,72.206 2.816,70.906 0.116,70.906 0.116,60.006 ; 40.502,30.923 43.202,30.923 44.502,29.623 44.502,26.923 65.302,26.923 65.302,29.623 66.602,30.923 69.302,30.923 69.302,41.823 66.602,41.823 65.302,43.123 65.302,45.823 44.502,45.823 44.502,43.123 43.202,41.823 40.502,41.823 40.502,30.923 ; 40.629,3.999 43.329,3.999 44.629,2.699 44.629,-0.001 65.429,-0.001 65.429,2.699 66.729,3.999 69.429,3.999 69.429,14.899 66.729,14.899 65.429,16.199 65.429,18.899 44.629,18.899 44.629,16.199 43.329,14.899 40.629,14.899 40.629,3.999 ; 41.01,59.879 43.71,59.879 45.01,58.579 45.01,55.879 65.81,55.879 65.81,58.579 67.11,59.879 69.81,59.879 69.81,70.779 67.11,70.779 65.81,72.079 65.81,74.779 45.01,74.779 45.01,72.079 43.71,70.779 41.01,70.779 41.01,59.879
  text "PPM" at 4.572,66.675 h0.76 r90
  text "PPM" at 45.466,66.548 h0.76 r90
  text "5V" at 4.572,64.643 h0.76 r90
  text "5V" at 45.466,64.516 h0.76 r90
  text "GND" at 4.572,61.595 h0.76 r90
  text "GND" at 45.466,61.468 h0.76 r90
  text "PPM" at 4.064,37.719 h0.76 r90
  text "PPM" at 44.958,37.592 h0.76 r90
  text "5V" at 4.064,35.687 h0.76 r90
  text "5V" at 44.958,35.56 h0.76 r90
  text "GND" at 4.064,32.639 h0.76 r90
  text "GND" at 44.958,32.512 h0.76 r90
  text "PPM" at 4.191,10.795 h0.76 r90
  text "PPM" at 45.085,10.668 h0.76 r90
  text "5V" at 4.191,8.763 h0.76 r90
  text "5V" at 45.085,8.636 h0.76 r90
  text "GND" at 4.191,5.715 h0.76 r90
  text "GND" at 45.085,5.588 h0.76 r90

## Text inside footprints (layer, text, board x,y; h text height)
C21: Mechanical 1 "PCB Edge" at 30.898,61.42 h0.25 r90
C21_1: Mechanical 1 "PCB Edge" at 71.792,61.293 h0.25 r90
C21_1_1: Mechanical 1 "PCB Edge" at 71.411,5.413 h0.25 r90
C21_1_2: Mechanical 1 "PCB Edge" at 71.284,32.337 h0.25 r90
C21_2: Mechanical 1 "PCB Edge" at 30.517,5.54 h0.25 r90
C21_3: Mechanical 1 "PCB Edge" at 30.39,32.464 h0.25 r90